# Altium PCB DS_Motor.PcbDoc
Units mil, origin at the board's own origin, x right, y up, seen from the top; angles counter-clockwise.
Board outline 3425 x 2095 mil, 2 copper layers (Top Layer, Bottom Layer); 47 components, 33 nets, 130 pads, 196 vias.
Unrouted connection lines stored in the file: 17.
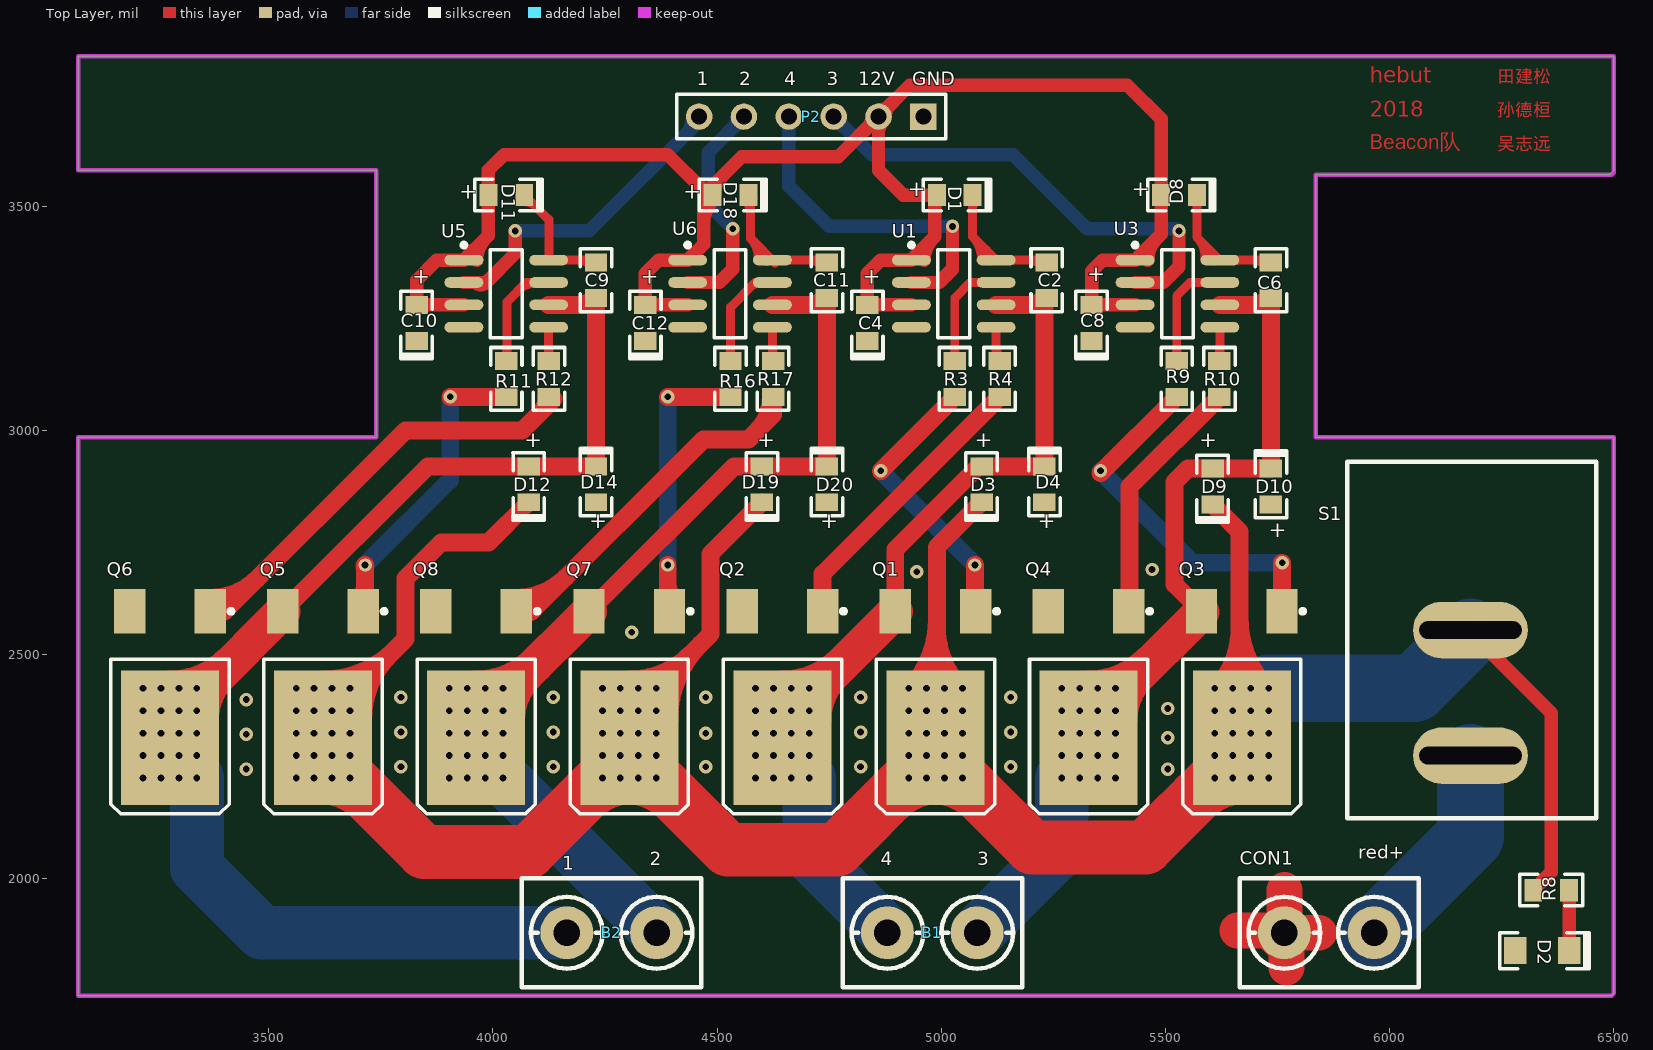
[diagram p0: Top Layer view]
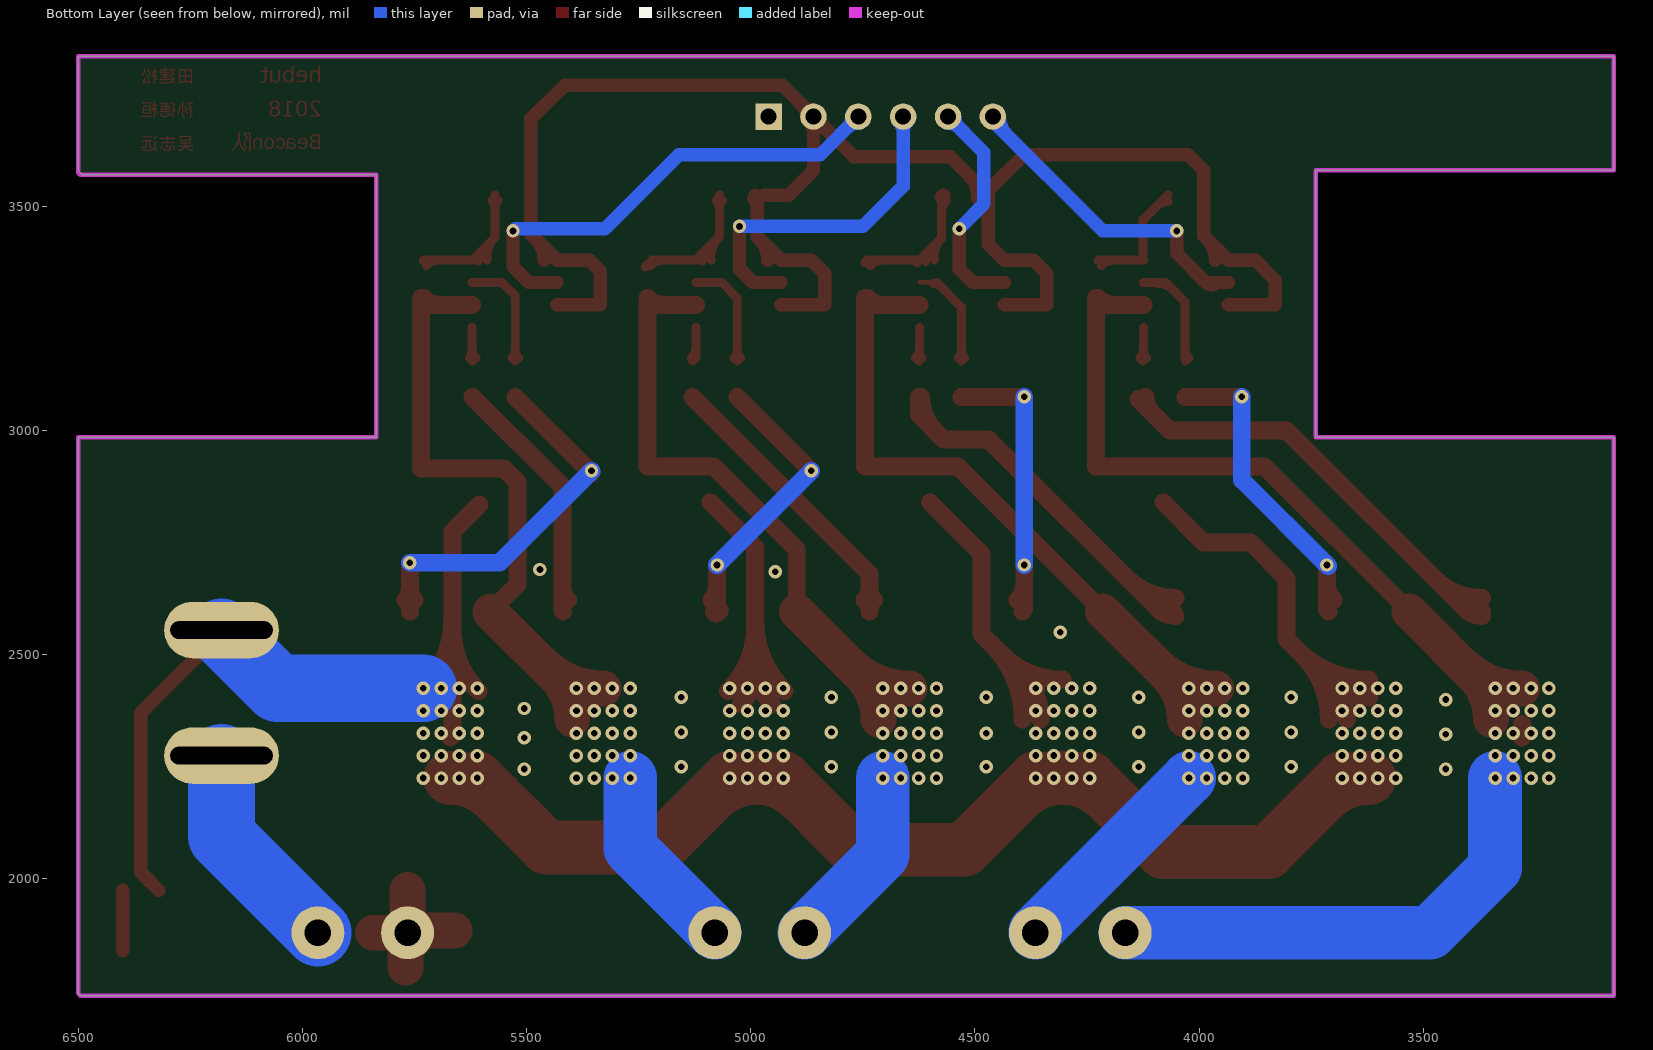
[diagram p1: Bottom Layer view, seen from below]

## Layer stack, top to bottom
Top Layer: signal copper 1.4
Dielectric: dielectric 12.6, FR-4, Dk 4.8
Bottom Layer: signal copper 1.4

## Board outline
3075,3825 3075,3580 3740,3580 3740,2985 3075,2985 3075,1740 6495,1740 6500,1745 6500,2985 5835,2985 5835,3570 6490,3570 6500,3580 6500,3835 3075,3835 3075,3825

## Design rules (kind name [scope] priority, off if disabled: settings)
Clearance [All] p1: gap=10
PolygonConnect [All] p1: connectstyle=Relief reliefconductorwidth=10 reliefentries=4 polygonreliefangle="90 Angle" airgapwidth=10
RoutingVias [All] p1: holewidth=28 width=50 viastyle="Through Hole" minholewidth=28 minwidth=50 maxholewidth=28 maxwidth=50
SolderMaskExpansion [All] p1: expansion=4
Width [All] p1: maxlimit=200 minlimit=10 preferedwidth=10 minimp=50.000000 maximp=50.000000 favimp=50.000000
28 further rules are at their usual default settings.

## Components (designator, comment, footprint, x,y, rotation, side; value= is the part's Value field where it differs from the comment)
B1 "Motor" KF301-2P 4980,1880 r270 top
B2 "Motor" KF301-2P 4265,1880 r270 top
C2 "1.5uF" 0805(2012) 5235,3335 r270 top
C4 "10uF" 0805LED 4835,3240 r270 top
C6 "1.5uF" 0805(2012) 5735,3335 r270 top
C8 "10uF" 0805LED 5335,3240 r270 top
C9 "1.5uF" 0805(2012) 4230,3335 r270 top
C10 "10uF" 0805LED 3830,3240 r270 top
C11 "1.5uF" 0805(2012) 4745,3335 r270 top
C12 "10uF" 0805LED 4340,3240 r270 top
CON1 "PoweIn" KF301-2P 5865,1880 r270 top
D1 "IN5819" 0805LED 5030,3525 r0 top
D2 "LED0" 1206C 6340,1840 r0 top
D3 "IN5819" 0805LED 5090,2880 r270 top
D4 "IN5819" 0805LED 5230,2880 r90 top
D8 "IN5819" 0805LED 5530,3525 r0 top
D9 "IN5819" 0805LED 5605,2875 r270 top
D10 "IN5819" 0805LED 5735,2875 r90 top
D11 "IN5819" 0805LED 4030,3525 r0 top
D12 "IN5819" 0805LED 4080,2880 r270 top
D14 "IN5819" 0805LED 4230,2880 r90 top
D18 "IN5819" 0805LED 4530,3525 r0 top
D19 "IN5819" 0805LED 4600,2880 r270 top
D20 "IN5819" 0805LED 4745,2880 r90 top
P2 "Motor" HDR1X6 4960,3700 r180 top
Q1 "LR7843" LR7843 4987.14,2455 r90 top
Q2 "LR7843" LR7843 4645.71,2455 r90 top
Q3 "LR7843" LR7843 5670,2455 r90 top
Q4 "LR7843" LR7843 5328.57,2455 r90 top
Q5 "LR7843" LR7843 3621.43,2455 r90 top
Q6 "LR7843" LR7843 3280,2455 r90 top
Q7 "LR7843" LR7843 4304.29,2455 r90 top
Q8 "LR7843" LR7843 3962.86,2455 r90 top
R3 "20R" 0805(2012) 5030,3115 r270 top
R4 "20R" 0805(2012) 5130,3115 r270 top
R8 "10k" 0805(2012) 6360,1975 r0 top
R9 "20R" 0805(2012) 5525,3115 r270 top
R10 "20R" 0805(2012) 5620,3115 r270 top
R11 "20R" 0805(2012) 4030,3115 r270 top
R12 "20R" 0805(2012) 4125,3115 r270 top
R16 "20R" 0805(2012) 4530,3115 r270 top
R17 "20R" 0805(2012) 4625,3115 r270 top
S1 "SW-SPST" "switch - duplicate" 5995,2410 r180 top
U1 "IR2104S" IR2104S 5027.78,3305 r0 top
U3 "IR2104S" IR2104S 5526.67,3305 r0 top
U5 "IR2104S" IR2104S 4030,3305 r0 top
U6 "IR2104S" IR2104S 4528.89,3305 r0 top

## Footprints (in the part's own frame and the unit in brackets; to place one, negate y for a bottom-side part, rotate by r counter-clockwise, add the part's x,y. Pads: shape width x height; smd on the part's side, far side on the other; paste and mask are expansions set on the pad)
0805(2012) [mil]
  rect 40x50 smd: 1(-40,0) 2(40,0)
  silkscreen extent -70,-35 70,35
0805LED [mil]
  rect 40x50 smd: 1(-40,0) 2(40,0)
  silkscreen extent -70,-35 80,35
1206C [mil]
  rect 50x60 smd: 1(60,0) 2(-60,0)
  silkscreen extent -95,-40 105,40
HDR1X6 [mm] "Connector; Header; 6 Position"
  round 1.5 hole 0.9: 1(12.7,0) 2(10.16,0) 3(7.62,0) 4(5.08,0) 5(2.54,0)
  rect 1.5x1.5 hole 0.9: 6(0,0)
  silkscreen extent -1.27,-1.27 13.97,1.27
IR2104S [mm]
  oval 2.2x0.6 smd: 1(-2.4,1.905) 2(-2.4,0.635) 3(-2.4,-0.635) 4(-2.4,-1.905) 5(2.4,-1.905) 6(2.4,-0.635) 7(2.4,0.635) 8(2.4,1.905)
  silkscreen extent -2.52,-2.5 0.9,2.88, body extent -2,-2.5 2,2.5, height 1.55
KF301-2P [mm]
  round 3 hole 1.5: 1(0,-2.54) 2(0,2.54)
  silkscreen extent -3.1,-5.08 3.1,5.08
LR7843 [mm]
  rect 2.54x1.778 smd: 1(3.6,-2.28) 3(3.6,2.28)
  rect 7.6x5.55 smd: 2(-3.556,0)
  silkscreen extent -7.87,-3.58 3.72,3.35
"switch - duplicate" [mm]
  oval 6.5x3.2 hole 1 slot 5.8 at 0 deg: 1(-4.699,3.429) 2(-4.699,-3.683)
  silkscreen extent -11.81,-13.21 2.29,6.98

## Part data
B1 B2: library part "Motor Servo", "Servo Motor"
C2 C6 C9 C11: library part "Cap Semi", "Capacitor (Semiconductor SIM Model)"
C4 C8 C10 C12: library part "Cap Pol3", "Polarized Capacitor (Surface Mount)"
CON1: library part "Header 2", "Header, 2-Pin"
D1 D3 D4 D8 D9 D10 D11 D12 D14 D18 D19 D20: library part Diode, "Default Diode"
D2: "Typical INFRARED GaAs LED"
Q1 Q2 Q3 Q4 Q5 Q6 Q7 Q8: library part NMOS-2, "N-Channel Power MOSFET"
R3 R4 R8 R9 R10 R11 R12 R16 R17: library part Res2, "Resistor"
S1: "Single-Pole, Single-Throw Switch"

## Via types
v1: diameter 30, hole 15, Top Layer to Bottom Layer, 196 vias

## Nets (pads, with @x,y where several pads share a name; then routed paths per layer and width w, separated by ;. In a path a pad name is that pad's centre, name@x,y a point inside that pad or via, vN(x,y) a via of type N, cw(c..) or ccw(c..) an arc to the next point about the centre after c; other vN are vias at no path point)
12V: C4.1 C8.1 C10.1 C12.1 D1.1 D8.1 D11.1 D18.1 P2.5 U1.1 U1.3 U3.1 U3.3 U5.1 U5.3 U6.1 U6.3 | length 4441.7
  Top Layer w30: U5.3 C10.1 3830,3335 3875,3380 U5.1 3990,3434.49 D11.1 3990,3580 4025,3615 4390,3615 4470,3535 D18.1@4470,3525 ; U5.1@3963.82,3380 cw(c4032.16,3380) 3983.84,3428.32 ; U6.3 C12.1 4340,3350 4370,3380 U6.1 4470,3415.6 D18.1@4470,3525 ; 4455.86,3549.14 ccw(c4490,3583.28) D18.1@4490,3535 ; 4470,3459.64 cw(c4550.36,3459.64) D18.1@4493.54,3516.46 ; D18.1@4470,3532.07 cw(c4477.93,3532.07) D18.1@4472.32,3537.68 ; D18.1@4495,3530 cw(c4543.28,3530) 4509.14,3564.14 ; P2.5@4845.47,3700 cw(c4810.4,3700) 4835.2,3675.2 cw(c4860,3650.4) P2.5@4860,3685.47 ; P2.5@4849.73,3689.73 cw(c4824.93,3664.93) 4860,3664.93 cw(c4895.07,3664.93) P2.5@4870.27,3689.73 ; P2.5@4860,3714.53 ccw(c4860,3749.6) 4884.8,3724.8 ccw(c4909.6,3700) P2.5@4874.53,3700 ; U1.3 C4.1 4835,3350 4865,3380 U1.1 4985,3431.71 4985,3520 D1.1 ; U1.1@4961.6,3380 cw(c5029.94,3380) 4981.61,3428.32 ; D1.1@4970,3525 4915,3525 4860,3580 P2.5 ; 4985,3495.86 cw(c5014.14,3495.86) D1.1@4993.54,3516.46 ; U3.3 C8.1 5335,3355 5360,3380 U3.1 5490,3437.82 5490,3695 5415,3770 4930,3770 P2.5 ; U3.1@5460.49,3380 cw(c5528.82,3380) 5480.5,3428.32 ; D18.1@4470,3525 4555,3610 4770,3610 P2.5
GND: C4.2 C8.2 C10.2 C12.2 CON1.1 D2.2 D4.1 D10.1 D14.1 D20.1 P2.6 Q2.3 Q4.3 Q6.3 Q8.3 U1.4 U3.4 U5.4 U6.4 | length 242.3
  Top Layer w80: 5660,1885 5730,1885 CON1.1@5756.36,1858.64 ; CON1.1@5765,1930 5765,1975 ; 5770,1802.5 CON1.1@5770,1847.5 ; CON1.1@5797.5,1880 5842.5,1880
  other v1: 5505,2245 3795,2250 4135,2250 4475,2250 4820,2250 5155,2250 5505,2315 4475,2325 3795,2327.5 4135,2327.5 4820,2327.5 5155,2327.5 5505,2380 3795,2405 4135,2405 4475,2405 4820,2405 5155,2405 4310,2550 4945,2685 5470,2690
"MOTOR1 IN1": P2.1 U5.2 | length 808.6
  Top Layer w30: U5.2 3985,3330 ; U5.2@3965.48,3327.2 ccw(c3973.37,3341.63) 3985,3330 ; U5.2@3967.01,3326.81 ccw(c3967.01,3362.55) 3992.28,3337.28 ; v1(4050,3445) 4050,3395 3985,3330
  Bottom Layer w20: P2.1@4460,3690 P2.1
  Bottom Layer w30: v1(4050,3445) 4215,3445 P2.1@4460,3690 ; 4428.13,3658.13 ccw(c4386.26,3700) P2.1@4445.47,3700
"MOTOR1 IN2": P2.2 U6.2 | length 588.2
  Top Layer w10: P2.2@4550,3690 P2.2
  Top Layer w30: U6.2 4505,3330 4535,3360 v1(4535,3450)
  Bottom Layer w10: v1@4535,3440 v1(4535,3450)
  Bottom Layer w30: v1(4535,3450) 4480,3505 4480,3620 P2.2 ; P2.2@4545.47,3700 cw(c4510.4,3700) 4535.2,3675.2 cw(c4560,3650.4) P2.2@4560,3685.47
"MOTOR1 IN3": P2.4 U3.2 | length 1116
  Top Layer w30: U3.2 5495,3330 5530,3365 v1(5530,3445)
  Bottom Layer w30: P2.4@4760,3685.47 cw(c4760,3650.4) 4784.8,3675.2 cw(c4809.6,3700) P2.4@4774.53,3700 ; P2.4 4845,3615 5160,3615 5325,3450 v1@5525,3450
"MOTOR1 IN4": P2.3 U1.2 | length 811.5
  Top Layer w30: U1.2 4995,3330 5025,3360 v1(5025,3455)
  Bottom Layer w30: P2.3@4649.73,3689.73 cw(c4624.93,3664.93) 4660,3664.93 cw(c4695.07,3664.93) P2.3@4670.27,3689.73 ; P2.3 4660,3545 4750,3455 v1(5025,3455)
NetB1_1: B1.1 C2.2 D3.1 D4.2 Q1.3 Q2.2 U1.6 | length 1992.6
  Top Layer w40: Q2.2@4706.32,2436.61 Q2.2@4737.26,2436.61 ; Q1.3 4897.38,2734.8 5082.57,2920 D3.1 D4.2 5230,3280 U1.6 ; 5193.79,3280 ccw(c5193.79,3331.21) C2.2@5230,3295
  Top Layer w80: Q2.2@4645.71,2424.61 ccw(c4645.71,2616.63) 4781.5,2480.85 ; Q2.2@4714.97,2355.35 cw(c4857.32,2355.35) 4756.66,2456.01 ; Q2.2@4737.26,2436.61 Q1.3
  Bottom Layer w120: v1(4705.71,2225) 4705.71,2054.29 B1.1
  other v1: 4585.71,2225 4625.71,2225 4665.71,2225 4585.71,2275 4625.71,2275 4665.71,2275 4705.71,2275 4585.71,2325 4625.71,2325 4665.71,2325 4705.71,2325 4585.71,2375 4625.71,2375 4665.71,2375 4705.71,2375 4585.71,2425 4625.71,2425 4665.71,2425 4705.71,2425
NetB1_2: B1.2 C6.2 D9.1 D10.2 Q3.3 Q4.2 U3.6 | length 2018.8
  Top Layer w40: Q3.3@5580.24,2595.24 Q3.3 5520,2656.97 5520,2885 5550,2915 D9.1 D10.2 C6.2 5720,3280 U3.6 ; 5693.79,3280 ccw(c5693.79,3331.21) C6.2@5730,3295
  Top Layer w80: Q4.2@5328.57,2424.61 ccw(c5328.57,2616.63) 5464.35,2480.85 ; Q4.2@5397.82,2355.35 cw(c5540.18,2355.35) 5439.52,2456.01 ; Q4.2@5410.82,2414.78 5410.82,2425.82 Q3.3@5580.24,2595.24
  Bottom Layer w120: B1.2 5268.57,2068.57 v1(5268.57,2225)
  other v1: 5308.57,2225 5348.57,2225 5388.57,2225 5268.57,2275 5308.57,2275 5348.57,2275 5388.57,2275 5268.57,2325 5308.57,2325 5348.57,2325 5388.57,2325 5268.57,2375 5308.57,2375 5348.57,2375 5388.57,2375 5268.57,2425 5308.57,2425 5348.57,2425 5388.57,2425
NetB2_1: B2.1 C9.2 D12.1 D14.2 Q5.3 Q6.2 U5.6 | length 2970.6
  Top Layer w30: C9.2@4215,3280 C9.2
  Top Layer w40: Q6.2 Q6.2@3280,2345.07 ; Q6.2@3337.38,2433.38 Q6.2@3340,2433.38 ; Q5.3 3854.93,2920 D12.1 D14.2 C9.2 ; U5.6 C9.2@4215,3280 ; 4188.79,3280 ccw(c4188.79,3331.21) C9.2@4225,3295
  Top Layer w80: Q6.2@3280,2424.61 ccw(c3280,2616.63) 3415.78,2480.85 ; Q6.2@3349.25,2355.35 cw(c3491.61,2355.35) 3390.95,2456.01 ; Q6.2@3368.31,2433.38 Q5.3
  Bottom Layer w120: v1(3340,2225) 3340,2025 3485,1880 B2.1
  other v1: 3220,2225 3260,2225 3300,2225 3220,2275 3260,2275 3300,2275 3340,2275 3220,2325 3260,2325 3300,2325 3340,2325 3220,2375 3260,2375 3300,2375 3340,2375 3220,2425 3260,2425 3300,2425 3340,2425
NetB2_2: B2.2 C11.2 D19.1 D20.2 Q7.3 Q8.2 U6.6 | length 2210
  Top Layer w40: Q7.3 4537.79,2920 D19.1 D20.2 C11.2 4730,3280 U6.6 ; 4703.79,3280 ccw(c4703.79,3331.21) C11.2@4740,3295
  Top Layer w80: Q8.2@3962.86,2424.61 ccw(c3962.86,2616.63) 4098.64,2480.85 ; Q8.2@4027.86,2435.94 4053.73,2435.94 Q7.3 ; Q8.2@4032.11,2355.35 cw(c4174.46,2355.35) 4073.8,2456.01
  Bottom Layer w120: v1(4022.86,2225) 4365,1882.86 B2.2
  other v1: 3902.86,2225 3942.86,2225 3982.86,2225 3902.86,2275 3942.86,2275 3982.86,2275 4022.86,2275 3902.86,2325 3942.86,2325 3982.86,2325 4022.86,2325 3902.86,2375 3942.86,2375 3982.86,2375 4022.86,2375 3902.86,2425 3942.86,2425 3982.86,2425 4022.86,2425
NetC2_1: C2.1 D1.2 U1.8 | length 439
  Top Layer w20: D1.2@5062.93,3512.93 cw(c5045.86,3495.86) 5070,3495.86 cw(c5094.14,3495.86) D1.2@5077.07,3512.93 ; D1.2 5070,3432.27 ; U1.8@5088.97,3380.16 ccw(c5023.61,3385.88) 5070,3432.26 ; 5100.33,3401.94 cw(c5079.39,3381) U1.8@5108.89,3378.41 ; 5193.79,3380 cw(c5193.79,3338.79) C2.1@5222.93,3367.93 ; C2.1@5235,3365 5220,3380 U1.8 5070,3432.27
NetC6_1: C6.1 D8.2 U3.8 | length 434.3
  Top Layer w10: C6.1@5730,3380 C6.1
  Top Layer w20: D8.2@5562.93,3512.93 cw(c5545.86,3495.86) 5570,3495.86 cw(c5594.14,3495.86) D8.2@5577.07,3512.93 ; D8.2 5570,3431.15 ; U3.8@5587.86,3380.2 ccw(c5525.96,3387.11) 5570,3431.15 ; 5599.4,3401.75 cw(c5578.86,3381.21) U3.8@5607.73,3377.98 ; 5693.79,3380 cw(c5693.79,3338.79) C6.1@5722.93,3367.93 ; C6.1@5730,3380 U3.8 5570,3431.15
NetC9_1: C9.1 D11.2 U5.8 | length 336.4
  Top Layer w10: C9.1@4225,3380 C9.1
  Top Layer w20: D11.2@4070,3510 cw(c4070,3473.79) 4095.61,3499.39 ; D11.2 4125,3470 4125,3380.51 U5.8 C9.1@4225,3380 ; 4188.79,3380 cw(c4188.79,3338.79) C9.1@4217.93,3367.93
NetC11_1: C11.1 D18.2 U6.8 | length 435.6
  Top Layer w20: D18.2@4562.93,3512.93 cw(c4533.79,3483.79) 4575,3483.79 ; D18.2@4575,3520 4575,3428.38 ; U6.8@4590.1,3380.32 ccw(c4536.51,3389.88) 4575,3428.38 ; 4602.1,3401.28 cw(c4582.5,3381.68) U6.8@4609.79,3376.8 ; U6.8@4629.2,3374.18 cw(c4628.48,3373.47) U6.8@4629.48,3373.29 ; 4703.79,3380 cw(c4703.79,3338.79) C11.1@4732.93,3367.93 ; C11.1 4740,3380 U6.8 4575,3428.38
  Top Layer w30: D18.2 D18.2@4575,3520
NetCON1_2: CON1.2 S1.1 | length 479.1
  Bottom Layer w150: CON1.2 6180,2095 S1.1@6180,2270
NetD2_1: D2.1 R8.2 | length 135
  Top Layer w30: D2.1 R8.2
NetQ1_1: Q1.1 R3.2 | length 667.9
  Top Layer w40: v1(4865,2910) R3.2 ; Q1.1@5075,2598.64 v1(5075,2700) ; 5075,2652.55 ccw(c5117.72,2652.55) Q1.1@5087.51,2622.34
  Top Layer w50: Q1.1@5075,2598.64 Q1.1
  Bottom Layer w40: v1(4865,2910) v1(5075,2700)
NetQ2_1: Q2.1 R4.2 | length 698.6
  Top Layer w40: Q2.1@4724.87,2622.34 ccw(c4699.26,2647.95) 4735.48,2647.95 ccw(c4771.69,2647.95) Q2.1@4746.08,2622.34 ; Q2.1 4735.48,2680.48 R4.2
NetQ3_1: Q3.1 R9.2 | length 895.6
  Top Layer w40: v1@5355,2905 R9.2 ; Q3.1@5749.16,2622.34 ccw(c5722.98,2648.52) 5760,2648.52 ; Q3.1 5760,2596.97 v1(5760,2705) ; 5760,2647.37 ccw(c5795.41,2647.37) Q3.1@5770.37,2622.34
  Bottom Layer w40: v1(5355,2910) 5560,2705 v1(5760,2705)
NetQ4_1: Q4.1 R10.2 | length 594.7
  Top Layer w40: Q4.1@5407.73,2622.34 ccw(c5378.1,2651.96) 5420,2651.96 ; Q4.1 5420,2598.4 5420,2875 R10.2
NetQ5_1: Q5.1 R11.2 | length 725.7
  Top Layer w40: Q5.1@3700.59,2622.34 ccw(c3665.79,2657.14) 3715,2657.14 ; Q5.1 3715,2600.54 v1(3715,2700) ; v1(3905,3075) R11.2
  Bottom Layer w40: v1@3712.5,2697.5 v1(3715,2700) 3905,2890 v1(3905,3075)
NetQ6_1: Q6.1 R12.2 | length 1159.4
  Top Layer w40: Q6.1@3369.76,2586.73 ccw(c3369.76,2639.77) 3407.27,2602.27 ; Q6.1 3401.73,2596.73 3805,3000 4065.5,3000 R12.2@4135.25,3069.75 ; Q6.1@3369.76,2626.73 ccw(c3369.76,2776.34) 3475.55,2670.55 ; 4105.5,3040 ccw(c4070.5,3075) R12.2@4120,3075
NetQ7_1: Q7.1 R16.2 | length 659.2
  Top Layer w40: 4390,2657.72 ccw(c4440.04,2657.72) Q7.1@4404.66,2622.34 ; v1(4390,2700) 4390,2600.78 Q7.1 ; v1(4390,3075) R16.2
  Bottom Layer w40: v1(4390,2700) v1(4390,3075)
NetQ8_1: Q8.1 R17.2 | length 1046.5
  Top Layer w30: Q8.1 Q8.1@4086.73,2596.73
  Top Layer w40: Q8.1@4052.62,2586.73 ccw(c4052.62,2644.94) 4093.78,2603.78 ; Q8.1@4052.62,2626.73 ccw(c4052.62,2781.51) 4162.07,2672.07 ; Q8.1@4086.73,2596.73 4470,2980 4570,2980 4625,3035 R17.2 ; 4588.18,2998.18 ccw(c4511.36,3075) R17.2@4620,3075
NetR3_1: R3.1 U1.7 | length 284.7
  Top Layer w20: R3.1@5022.93,3162.07 ccw(c5005.86,3179.14) 5030,3179.14 ccw(c5054.14,3179.14) R3.1@5037.07,3162.07 ; R3.1 5030,3295 5065,3330 U1.7
NetR4_1: R4.1 U1.5 | length 104.5
  Top Layer w20: 5122.27,3185.74 ccw(c5155.74,3185.74) R4.1@5132.07,3162.07 ; U1.5 5122.27,3162.73 R4.1
NetR9_1: R9.1 U3.7 | length 291.5
  Top Layer w20: R9.1@5517.93,3162.07 ccw(c5500.86,3179.14) 5525,3179.14 ccw(c5549.14,3179.14) R9.1@5532.07,3162.07 ; R9.1 5525,3300 5555,3330 U3.7
NetR10_1: R10.1 U3.5 | length 113.4
  Top Layer w20: R10.1@5612.93,3162.07 ccw(c5593.07,3181.93) 5621.15,3181.93 ; R10.1 5621.15,3156.15 U3.5 ; 5621.15,3176.36 ccw(c5641.36,3176.36) R10.1@5627.07,3162.07
NetR11_1: R11.1 U5.7 | length 305
  Top Layer w20: R11.1@4022.93,3162.07 ccw(c4001.03,3183.97) 4032,3183.97 ; R11.1 4032,3157 4032,3287 4075,3330 U5.7 ; 4059.19,3314.19 cw(c4092.99,3280.38) U5.7@4092.99,3328.19
NetR12_1: R12.1 U5.5 | length 113.1
  Top Layer w20: R12.1@4117.93,3162.07 ccw(c4102.09,3177.91) 4124.49,3177.91 ; 4124.49,3180.38 ccw(c4150.38,3180.38) R12.1@4132.07,3162.07 ; U5.5 4124.49,3155.51 R12.1
NetR16_1: R16.1 U6.7 | length 290.6
  Top Layer w10: U6.7@4585,3330 U6.7
  Top Layer w20: R16.1@4522.93,3162.07 ccw(c4505.86,3179.14) 4530,3179.14 ccw(c4554.14,3179.14) R16.1@4537.07,3162.07 ; R16.1 4530,3275 U6.7@4585,3330 ; 4577.04,3322.04 cw(c4591.88,3307.2) U6.7@4591.88,3328.19
NetR17_1: R17.1 U6.5 | length 113.6
  Top Layer w20: R17.1@4617.93,3162.07 ccw(c4604.77,3175.23) 4623.38,3175.23 ; 4623.38,3183.06 ccw(c4653.06,3183.06) R17.1@4632.07,3162.07 ; U6.5 4623.38,3156.62 R17.1
VBAT: D3.2 D9.2 D12.2 D19.2 Q1.2 Q3.2 Q5.2 Q7.2 R8.1 S1.2 | length 8133.1
  Top Layer w30: S1.2@6180,2550 6360,2370 6360,2015.36 6355,2010.36 6355,2010 R8.1
  Top Layer w40: Q5.2@3621.43,2404.61 ccw(c3621.43,2532.99) Q5.2@3712.21,2442.21 ; Q5.2@3621.43,2444.61 ccw(c3621.43,2669.56) 3780.49,2510.49 ; Q5.2@3670.68,2355.35 cw(c3780.11,2355.35) Q5.2@3702.73,2432.73 ; v1(3681.43,2425) 3695,2425 3805,2535 3805,2670 3885,2750 3990,2750 D12.2 ; Q5.2@3710.68,2355.35 cw(c3916.68,2355.35) 3771.01,2501.02 ; Q7.2@4304.29,2444.61 ccw(c4304.29,2636.79) 4440.18,2500.9 ; Q7.2@4353.54,2355.35 cw(c4495.73,2355.35) Q7.2@4395.18,2455.9 ; v1(4364.29,2425) 4485,2545.71 4485,2725 D19.2 ; Q7.2@4393.54,2355.35 cw(c4632.3,2355.35) 4463.47,2524.18 ; Q1.2@4924.03,2418.47 ccw(c4764.77,2577.73) 4990,2577.73 ; Q1.2@4952.32,2390.18 ccw(c4861.34,2481.16) 4990,2481.16 ; v1(4967.14,2425) 4990,2447.86 4990,2740 D3.2 ; 4990,2467.36 ccw(c5099.15,2467.36) Q1.2@5021.97,2390.18 ; 4990,2563.93 ccw(c5195.72,2563.93) Q1.2@5050.25,2418.47 ; D9.2 5665,2775 5665,2320 Q3.2 ; Q3.2@5606.89,2418.47 ccw(c5466.6,2558.76) 5665,2558.76 ; 5665,2486.33 ccw(c5800.97,2486.33) Q3.2@5704.83,2390.18 ; 5665,2582.9 ccw(c5897.54,2582.9) Q3.2@5733.11,2418.47
  Top Layer w120: Q5.2@3621.43,2225.39 cw(c3621.43,2081.49) Q5.2@3723.18,2183.25 ; v1(3681.43,2225) 3846.43,2060 4079.29,2060 v1(4244.29,2225) ; Q7.2@4202.53,2183.25 cw(c4304.29,2081.49) 4304.29,2225.39 cw(c4304.29,2081.49) Q7.2@4406.04,2183.25 ; v1(4284.29,2225) v1(4324.29,2225) ; v1(4364.29,2225) 4524.29,2065 4767.14,2065 v1(4927.14,2225) ; Q1.2@4885.39,2183.25 cw(c4987.14,2081.49) 4987.14,2225.39 cw(c4987.14,2081.49) Q1.2@5088.9,2183.25 ; v1(4967.14,2225) v1(5007.14,2225) ; v1(5047.14,2225) 5202.14,2070 5455,2070 v1(5610,2225) ; Q3.2@5568.25,2183.25 cw(c5670,2081.49) Q3.2@5670,2225.39
  Bottom Layer w150: v1(5730,2425) 6055,2425 S1.2@6180,2550
  other v1: 3561.43,2225 3601.43,2225 3641.43,2225 5650,2225 5690,2225 5730,2225 3561.43,2275 3601.43,2275 3641.43,2275 3681.43,2275 4244.29,2275 4284.29,2275 4324.29,2275 4364.29,2275 4927.14,2275 4967.14,2275 5007.14,2275 5047.14,2275 5610,2275 5650,2275 5690,2275 5730,2275 3561.43,2325 3601.43,2325 3641.43,2325 3681.43,2325 4244.29,2325 4284.29,2325 4324.29,2325 4364.29,2325 4927.14,2325 4967.14,2325 5007.14,2325 5047.14,2325 5610,2325 5650,2325 5690,2325 5730,2325 3561.43,2375 3601.43,2375 3641.43,2375 3681.43,2375 4244.29,2375 4284.29,2375 4324.29,2375 4364.29,2375 4927.14,2375 4967.14,2375 5007.14,2375 5047.14,2375 5610,2375 5650,2375 5690,2375 5730,2375 3561.43,2425 3601.43,2425 3641.43,2425 4244.29,2425 4284.29,2425 4324.29,2425 4927.14,2425 5007.14,2425 5047.14,2425 5610,2425 5650,2425 5690,2425
copper on no net:
  other v1: 3450,2245 3450,2322.5 3450,2400

## Keep-outs
Keep-Out Layer:
  lines w10: 3075,1740 6495,1740 6500,1745 6500,2985 5835,2985 5835,3570 6495,3570 6500,3575 6500,3835 3075,3835 3075,3580 3740,3580 3740,2985 3075,2985 3075,1740

## Other copper
Top Layer:
  text "田建松" at 6240,3765 h50
  text "hebut" at 5955,3763.12 h60
  text "孙德桓" at 6239.95,3690.93 h50
  text "2018" at 5954.94,3687.19 h60
  text "Beacon队" at 5955,3615 h60
  text "吴志远" at 6240,3615 h50

## Silkscreen, mask and mechanical layers (free items; w line width, h text height)
Top Overlay:
  text "1" at 4455,3770 h30
  text "2" at 4550,3770 h30
  text "4" at 4650,3770 h30
  text "3" at 4745,3770 h30
  text "12V" at 4815,3770 h30
  text "GND" at 4935,3770 h30
  text "+" at 4925,3510 h60
  text "+" at 5425,3510 h60
  text "+" at 3925,3505 h60
  text "+" at 4425,3505 h60
  text "+" at 5325,3320 h60
  text "+" at 3820,3315 h60
  text "+" at 4330,3315 h60
  text "+" at 4825,3315 h60
  text "+" at 4070,2950 h60
  text "+" at 4590,2950 h60
  text "+" at 5075,2950 h60
  text "+" at 5575,2950 h60
  text "+" at 4215,2770 h60
  text "+" at 4730,2770 h60
  text "+" at 5215,2770 h60
  text "+" at 5730,2750 h60
  text "red+" at 5930,2045 h30
  text "2" at 4350,2030 h30
  text "4" at 4865,2030 h30
  text "3" at 5080,2030 h30
  text "1" at 4155,2020 h30
Top Paste:
  lines w80: 3368.31,2433.38 3531.66,2596.73 ; 4042.79,2425 4214.52,2596.73 ; 4725.65,2425 4897.38,2596.73 ; 5408.5,2425 5580.24,2596.73
  lines w120: 3681.43,2225 3846.43,2060 4079.29,2060 4244.29,2225 ; 4284.29,2225 4324.29,2225 ; 4364.29,2225 4524.29,2065 4767.14,2065 4927.14,2225 ; 4967.14,2225 5007.14,2225 ; 5047.14,2225 5202.14,2070 5455,2070 5610,2225
Bottom Paste:
  lines w120: 3340,2225 3340,2020 3480,1880 4165,1880 ; 4023.37,2225 4368.37,1880 ; 4705.71,2225 4705.71,2054.29 4880,1880 ; 5080,1880 5268.57,2068.57 5268.57,2225
  lines w150: 5730,2425 6055,2425 6180,2550 ; 5965,1880 6180,2095 6180,2270
Top Solder:
  lines w80: 3368.31,2433.38 3531.66,2596.73 ; 4042.79,2425 4214.52,2596.73 ; 4725.65,2425 4897.38,2596.73 ; 5408.5,2425 5580.24,2596.73
  lines w120: 3681.43,2225 3846.43,2060 4079.29,2060 4244.29,2225 ; 4284.29,2225 4324.29,2225 ; 4364.29,2225 4524.29,2065 4767.14,2065 4927.14,2225 ; 4967.14,2225 5007.14,2225 ; 5047.14,2225 5202.14,2070 5455,2070 5610,2225
Bottom Solder:
  lines w120: 3340,2225 3340,2020 3480,1880 4165,1880 ; 4022.86,2225 4365,1882.86 ; 4705.71,2225 4705.71,2054.29 4880,1880 ; 5080,1880 5268.57,2068.57 5268.57,2225
  lines w150: 5730,2425 6055,2425 6180,2550 ; 5965,1880 6180,2095 6180,2270
Mechanical 5:
  lines w19.68: 3073.98,1744.11 3073.98,2984.26 ; 3073.98,1744.11 4786.58,1744.11 ; 3073.98,1744.11 4786.58,1744.11 ; 3073.98,1744.11 3073.98,2984.26 ; 3073.98,2984.26 3743.27,2984.26 ; 3073.98,2984.26 3743.27,2984.26 ; 3073.98,3574.82 3073.98,3830.72 ; 3073.98,3574.82 3743.27,3574.82 ; 3073.98,3574.82 3743.27,3574.82 ; 3073.98,3574.82 3073.98,3830.72 ; 3073.98,3830.72 4786.58,3830.72 ; 3073.98,3830.72 4786.58,3830.72 ; 3743.27,2984.26 3743.27,3574.82 ; 3743.27,2984.26 3743.27,3574.82 ; 4786.58,1744.11 6499.18,1744.11 ; 4786.58,1744.11 6499.18,1744.11 ; 4786.58,3830.72 6499.18,3830.72 ; 4786.58,3830.72 6499.18,3830.72 ; 5829.89,2984.26 5829.89,3574.82 ; 5829.89,2984.26 6499.18,2984.26 ; 5829.89,2984.26 6499.18,2984.26 ; 5829.89,2984.26 5829.89,3574.82 ; 5829.89,3574.82 6499.18,3574.82 ; 5829.89,3574.82 6499.18,3574.82 ; 6499.18,1744.11 6499.18,2984.26 ; 6499.18,1744.11 6499.18,2984.26 ; 6499.18,3574.82 6499.18,3830.72 ; 6499.18,3574.82 6499.18,3830.72 ; 1052.68,1018.9 1096.18,1018.9 1139.68,1018.9 1139.68,1050.4 1122.68,1050.4 1122.68,1065.4 1139.68,1065.4 1139.68,1071.9 1096.18,1071.9 1052.68,1071.9 1052.68,1065.4 1069.68,1065.4 1069.68,1050.4 1052.68,1050.4 1052.68,1018.9 ; 1084.68,1054.4 1084.68,1070.4 1096.18,1070.4 1107.68,1070.4 1107.68,1054.4 1096.18,1054.4 1084.68,1054.4 ; 4333.83,3141.74 4333.83,3771.67 4786.58,3771.67 5239.34,3771.67 5239.34,3141.74 4786.58,3141.74 4333.83,3141.74